# Altium PCB B45100557C.PCBDOC
Units mil, origin at the board's own origin, x right, y up, seen from the top; angles counter-clockwise.
Board outline 6000 x 4000 mil, 4 copper layers (Top Layer, L2, L3, Bottom Layer); 9 components, 46 nets, 208 pads, 0 vias.
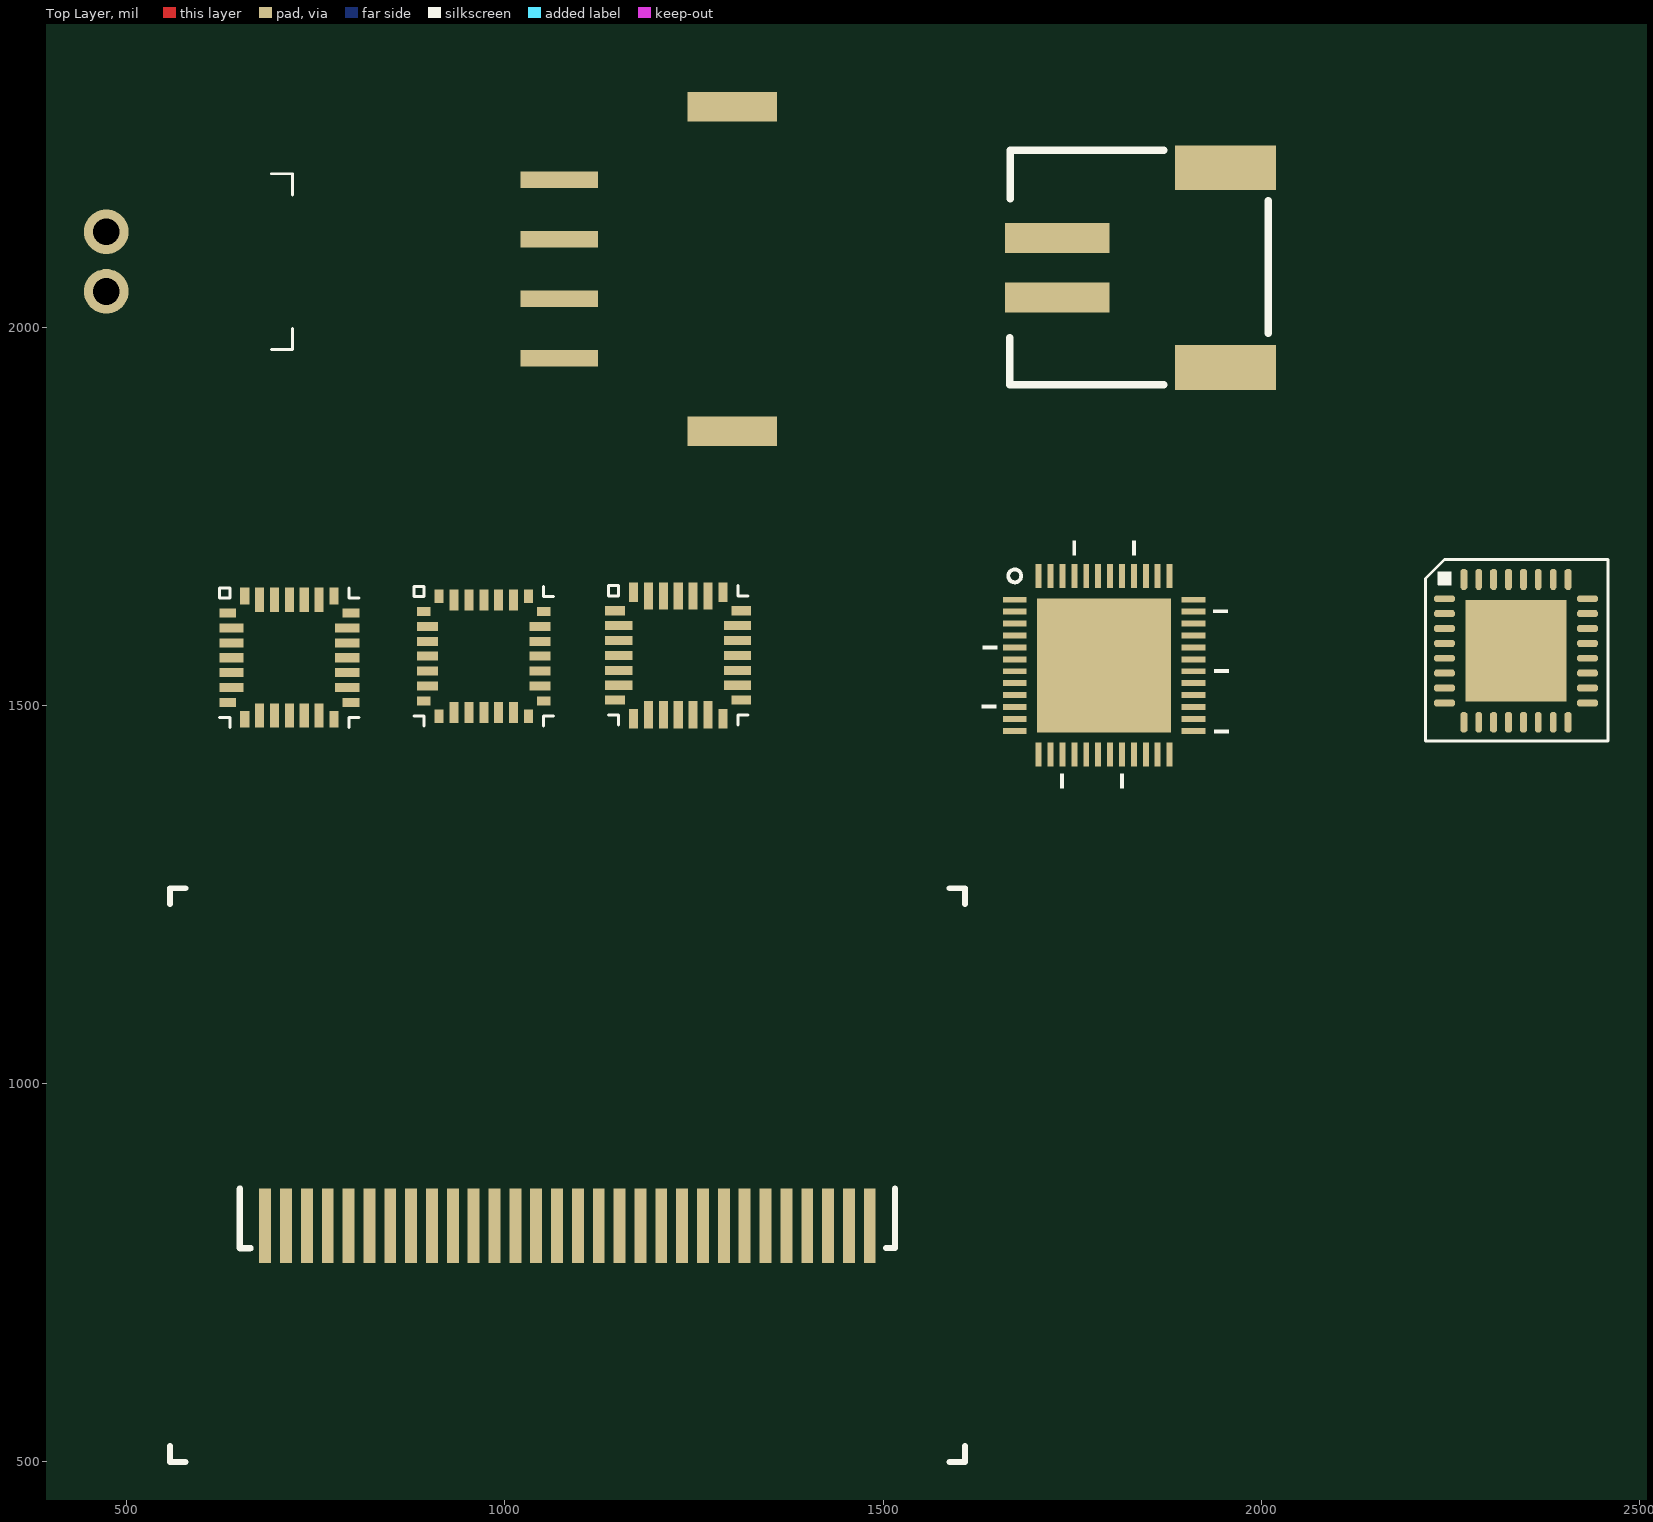
[diagram p0: Top Layer view]
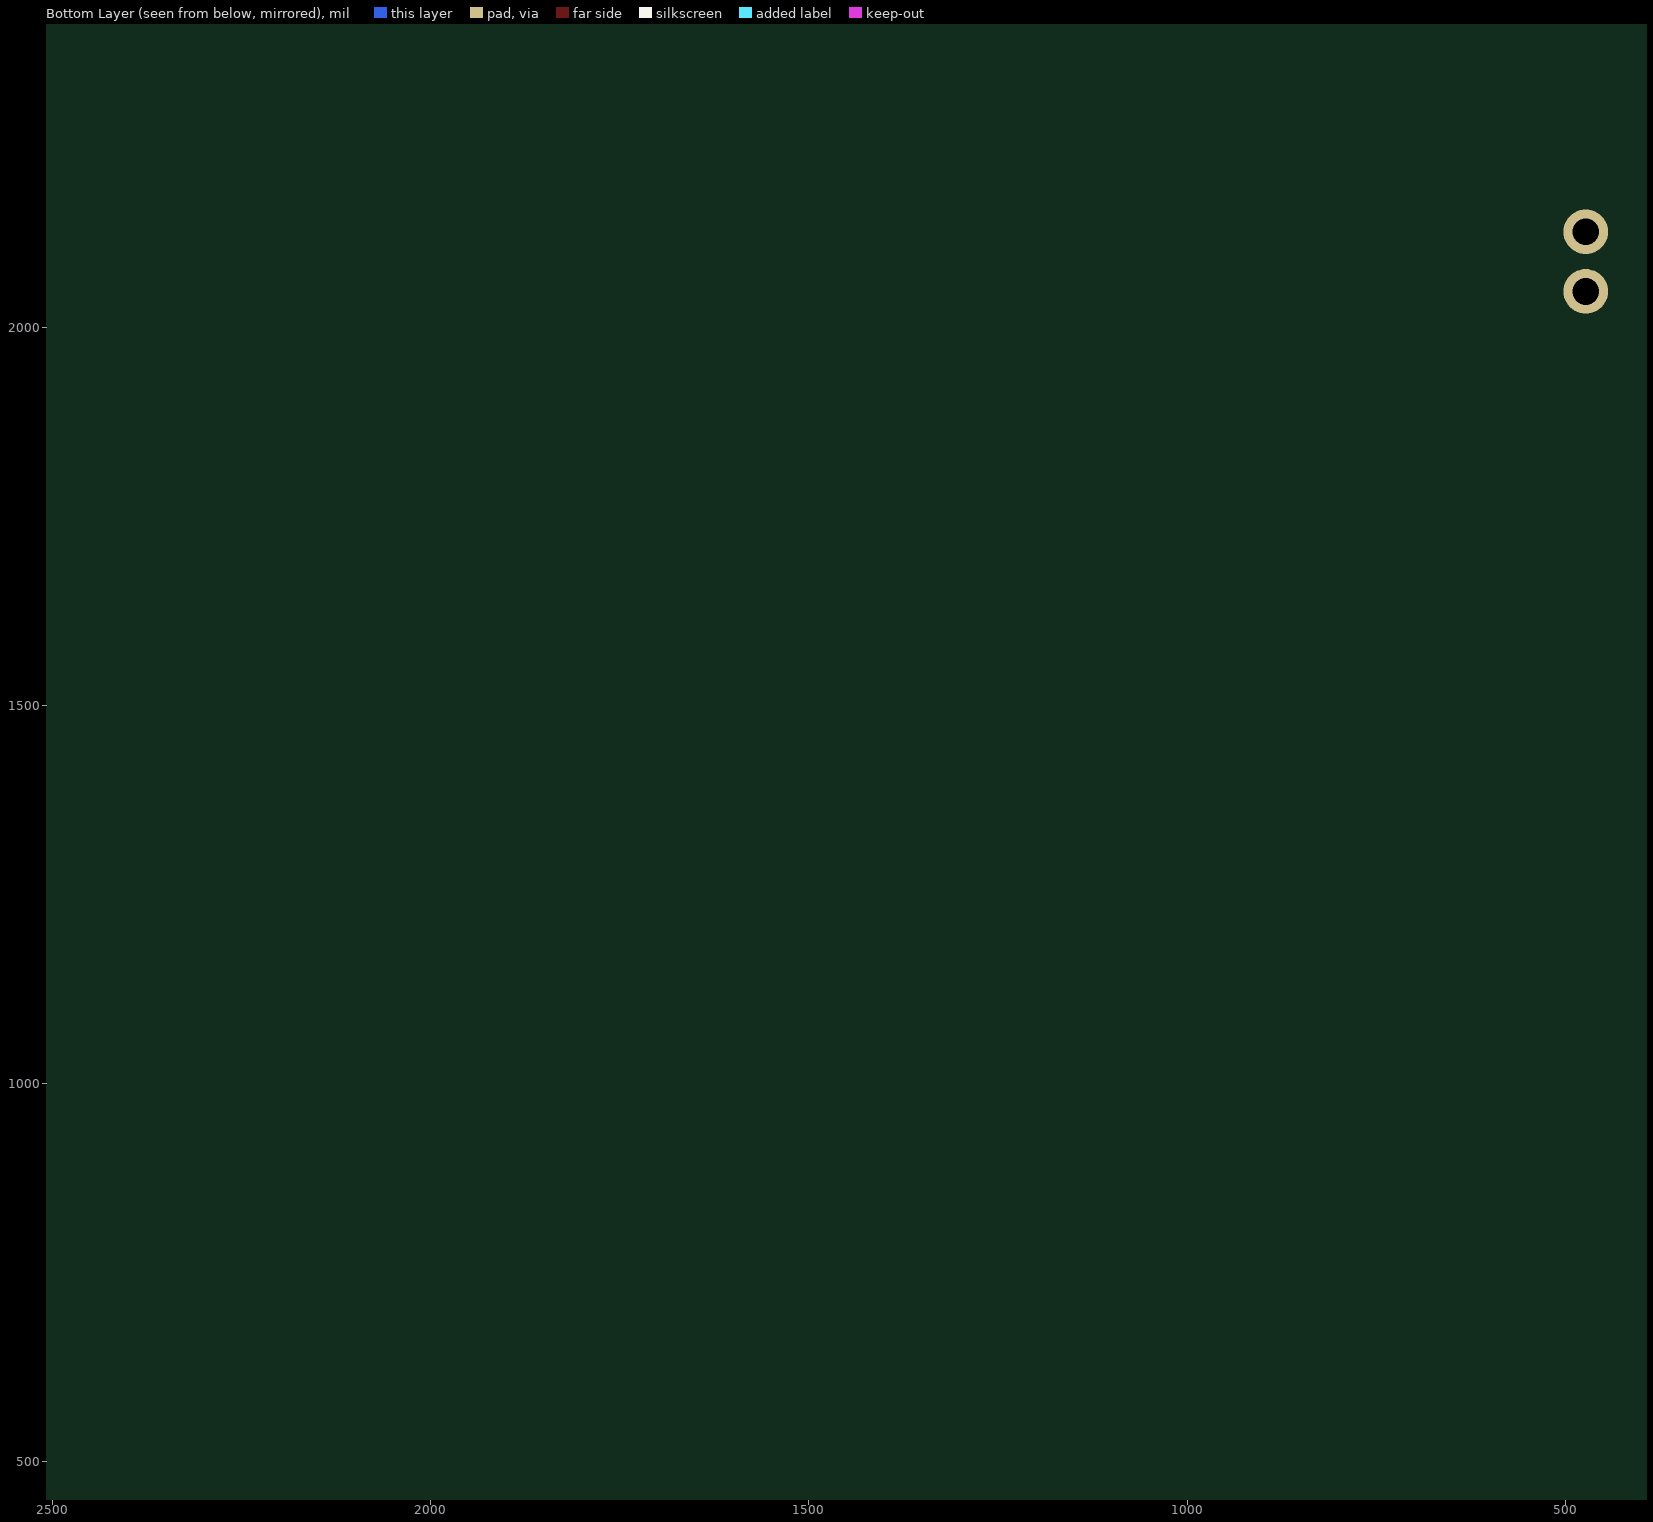
[diagram p1: Bottom Layer view, seen from below]

## Layer stack, top to bottom
Top Layer: signal copper 1.4
Dielectric: core 12.6, FR-4, Dk 4.8
L2: signal copper 1.417
Dielectric: prepreg 12.6, FR-4, Dk 4.8
L3: signal copper 1.417
Dielectric: core 12.6, FR-4, Dk 4.8
Bottom Layer: signal copper 1.4

## Board outline
-599.3,-613.99 5400.7,-613.99 5400.7,3386.01 -599.3,3386.01

## Design rules (kind name [scope] priority, off if disabled: settings)
Clearance [All] p1: gap=6
ComponentClearance [All] p1: gap=0 collisioncheckmode=3 verticalgap=0 showdistances=FALSE
FabricationTestPointUsage TestPointUsage [All] p1: valid=0 allowmultiple=FALSE
FabricationTestpoint Testpoint [All] p1: side=3 testpointundercomponent=TRUE minsize=40 maxsize=100 preferedsize=60 minholesize=0 maxholesize=40 preferedholesize=32 testpointgrid=1 allowsidetop=TRUE allowsidebottom=TRUE usegrid=TRUE gridtolerance=0.01
PolygonConnect PolygonConnect_1 [(InPadClass('All Pads'))] p1: connectstyle=Relief reliefconductorwidth=10 reliefentries=4 polygonreliefangle="90 Angle"
PolygonConnect [All] p2: connectstyle=Direct reliefconductorwidth=10 reliefentries=4 polygonreliefangle="90 Angle"
RoutingVias [All] p1: holewidth=28 width=50 viastyle="Through Hole" minholewidth=28 minwidth=50 maxholewidth=28 maxwidth=50
SilkscreenOverComponentPads [All] p1: minsilkscreentomaskgap=10
SolderMaskExpansion [All] p1: expansion=4
Width [All] p1: maxlimit=100 minlimit=5.91 preferedwidth=6 toplayer_prefwidth=5.98 bottomlayer_prefwidth=5.98 minimp=50.000000 maximp=50.000000 favimp=50.000000
24 further rules are at their usual default settings.

## Components (designator, comment, footprint, x,y, rotation, side; value= is the part's Value field where it differs from the comment)
? "Comment" OLED-0.96-30 557,500 r0 top
? "Comment" UFQFPN32 2242,1641 r0 top
? "Comment" QFN-48-6x6-0.4 1792,1553 r0 top
? "Comment" UFQFPN28-4x4mm-M 1229,1566 r0 top
? "Comment" UFQFPN28-4x4mm-L 972,1565 r0 top
? "Comment" UFQFPN28-4x4mm 715,1563 r0 top
? "Comment" S2B-PH-SM4 1668,2234 r0 top
? "Comment" S4B-PH-SM4 1072,2195 r0 top
? "Comment" S2B-PH-K-S 473,2126 r0 top

## Footprints (in the part's own frame and the unit in brackets; to place one, negate y for a bottom-side part, rotate by r counter-clockwise, add the part's x,y. Pads: shape width x height; smd on the part's side, far side on the other; paste and mask are expansions set on the pad)
OLED-0.96-30 [mm]
  rect 0.4x2.5 smd: 1(3.2,7.925) 2(3.9,7.925) 3(4.6,7.925) 4(5.3,7.925) 5(6,7.925) 6(6.7,7.925) 7(7.4,7.925) 8(8.1,7.925) 9(8.8,7.925) 10(9.5,7.925) 11(10.2,7.925) 12(10.9,7.925) 13(11.6,7.925) 14(12.3,7.925) 15(13,7.925) 16(13.7,7.925) 17(14.4,7.925) 18(15.1,7.925) 19(15.8,7.925) 20(16.5,7.925) 21(17.2,7.925) 22(17.9,7.925) 23(18.6,7.925) 24(19.3,7.925) 25(20,7.925) 26(20.7,7.925) 27(21.4,7.925) 28(22.1,7.925) 29(22.8,7.925) 30(23.5,7.925)
  silkscreen extent 0,0 26.7,19.26
QFN-48-6x6-0.4 [mm]
  rect 4.5x4.5 smd: 0(0,0)
  rect 0.8x0.2 smd: 1(-3,2.2) 2(-3,1.8) 3(-3,1.4) 4(-3,1) 5(-3,0.6) 6(-3,0.2) 7(-3,-0.2) 8(-3,-0.6) 9(-3,-1) 10(-3,-1.4) 11(-3,-1.8) 12(-3,-2.2) 25(3,-2.2) 26(3,-1.8) 27(3,-1.4) 28(3,-1) 29(3,-0.6) 30(3,-0.2) 31(3,0.2) 32(3,0.6) 33(3,1) 34(3,1.4) 35(3,1.8) 36(3,2.2)
  rect 0.2x0.8 smd: 13(-2.2,-3) 14(-1.8,-3) 15(-1.4,-3) 16(-1,-3) 17(-0.6,-3) 18(-0.2,-3) 19(0.2,-3) 20(0.6,-3) 21(1,-3) 22(1.4,-3) 23(1.8,-3) 24(2.2,-3) 37(2.2,3) 38(1.8,3) 39(1.4,3) 40(1,3) 41(0.6,3) 42(0.2,3) 43(-0.2,3) 44(-0.6,3) 45(-1,3) 46(-1.4,3) 47(-1.8,3) 48(-2.2,3)
  silkscreen extent -4.11,-4.14 4.19,4.19
S2B-PH-K-S [mm] "JST"
  round 1.5 hole 0.9: 1(0,0) 2(0,-2)
  silkscreen extent 5.54,-3.95 6.25,1.95
S2B-PH-SM4 [mm] "JST"
  rect 3.5x1 smd: 1(1.575,-2.946) 2(1.575,-4.946)
  rect 3.4x1.5 smd: P1(7.225,-0.596) P2(7.225,-7.296)
  silkscreen extent -0.03,-7.87 8.66,0, body extent 0.02,-7.87 8.62,0.03, height 0.1
S4B-PH-SM4 [mm]
  rect 2.6x0.55 smd: 1(0,0) 2(0,-2) 3(0,-4) 4(0,-6)
  rect 3x1 smd: P1(5.8,2.45) P2(5.8,-8.45)
UFQFPN28-4x4mm [mil]
  rect 22x12 smd paste-6: 1(-81.5,59.06) 7(-81.5,-59.06) 15(81.5,-59.06) 21(81.5,59.06)
  rect 32x12 smd: 2(-76.5,39.37) 3(-76.5,19.68) 4(-76.5,0) 5(-76.5,-19.68) 6(-76.5,-39.37) 16(76.5,-39.37) 17(76.5,-19.68) 18(76.5,0) 19(76.5,19.68) 20(76.5,39.37)
  rect 12x22 smd paste-6: 8(-59.06,-81.5) 14(59.06,-81.5) 22(59.06,81.5) 28(-59.06,81.5)
  rect 12x32 smd: 9(-39.37,-76.5) 10(-19.69,-76.5) 11(0,-76.5) 12(19.68,-76.5) 13(39.37,-76.5) 23(39.37,76.5) 24(19.68,76.5) 25(0,76.5) 26(-19.69,76.5) 27(-39.37,76.5)
  silkscreen extent -92,-92 92,92
UFQFPN28-4x4mm-L [mil]
  rect 18x12 smd: 1(-79.5,59.06) 7(-79.5,-59.06) 15(79.5,-59.06) 21(79.5,59.06)
  rect 28x12 smd: 2(-74.5,39.37) 3(-74.5,19.68) 4(-74.5,0) 5(-74.5,-19.68) 6(-74.5,-39.37) 16(74.5,-39.37) 17(74.5,-19.68) 18(74.5,0) 19(74.5,19.68) 20(74.5,39.37)
  rect 12x18 smd: 8(-59.06,-79.5) 14(59.06,-79.5) 22(59.06,79.5) 28(-59.06,79.5)
  rect 12x28 smd: 9(-39.37,-74.5) 10(-19.69,-74.5) 11(0,-74.5) 12(19.68,-74.5) 13(39.37,-74.5) 23(39.37,74.5) 24(19.68,74.5) 25(0,74.5) 26(-19.69,74.5) 27(-39.37,74.5)
  silkscreen extent -92,-92 92,92
UFQFPN28-4x4mm-M [mil]
  rect 26x12 smd: 1(-83.5,59.06) 7(-83.5,-59.06) 15(83.5,-59.06) 21(83.5,59.06)
  rect 36x12 smd: 2(-78.5,39.37) 3(-78.5,19.68) 4(-78.5,0) 5(-78.5,-19.68) 6(-78.5,-39.37) 16(78.5,-39.37) 17(78.5,-19.68) 18(78.5,0) 19(78.5,19.68) 20(78.5,39.37)
  rect 12x26 smd: 8(-59.06,-83.5) 14(59.06,-83.5) 22(59.06,83.5) 28(-59.06,83.5)
  rect 12x36 smd: 9(-39.37,-78.5) 10(-19.69,-78.5) 11(0,-78.5) 12(19.68,-78.5) 13(39.37,-78.5) 23(39.37,78.5) 24(19.68,78.5) 25(0,78.5) 26(-19.69,78.5) 27(-39.37,78.5)
  silkscreen extent -92,-92 92,92
UFQFPN32 [mm]
  oct 0.7x0.23 smd: 1(0,0) 2(0,-0.5) 3(0,-1) 4(0,-1.5) 5(0,-2) 6(0,-2.5) 7(0,-3) 8(0,-3.5) 17(4.8,-3.5) 18(4.8,-3) 19(4.8,-2.5) 20(4.8,-2) 21(4.8,-1.5) 22(4.8,-1) 23(4.8,-0.5) 24(4.8,0)
  oct 0.23x0.7 smd: 9(0.65,-4.15) 10(1.15,-4.15) 11(1.65,-4.15) 12(2.15,-4.15) 13(2.65,-4.15) 14(3.15,-4.15) 15(3.65,-4.15) 16(4.15,-4.15) 25(4.15,0.65) 26(3.65,0.65) 27(3.15,0.65) 28(2.65,0.65) 29(2.15,0.65) 30(1.65,0.65) 31(1.15,0.65) 32(0.65,0.65)
  rect 3.4x3.4 smd: 33(2.4,-1.75)
  silkscreen extent -0.64,-4.77 5.49,1.32

## Nets (pads, with @x,y where several pads share a name; then routed paths per layer and width w, separated by ;. In a path a pad name is that pad's centre, name@x,y a point inside that pad or via, vN(x,y) a via of type N, cw(c..) or ccw(c..) an arc to the next point about the centre after c; other vN are vias at no path point)
1V8: 
3V: 
BLUE: 
CHG: 
GND: 
I2C_SCL: 
I2C_SDA: 
"IMU INT": 
INSERT: 
NetANT1_1: 
NetC3_1: 
NetC7_2: 
NetC8_2: 
NetC9_1: 
NetC20_1: 
NetC29_1: 
NetC31_1: 
NetC32_1: 
NetINT_1: 
NetL1_1: 
NetL2_2: 
NetL4_1: 
NetLED1_1: 
NetLED1_2: 
NetQ1_1: 
NetR10_1: 
NetR11_1: 
NetR13_2: 
NetR17_2: 
NetR33_2: 
NetRXD_1: 
NetTXD_1: 
RED: 
S1: 
S2: 
SCL: 
SDA: 
SWDCLK: 
SWDIO: 
VBAT: 
VBUS: 
VOLTAGE: 
XC1: 
XC2: 
XL1: 
XL2: 
pads on no net: ?.0 ?.1 ?.2 ?.3 ?.4 ?.5 ?.6 ?.7 ?.8 ?.9 ?.10 ?.11 ?.12 ?.13 ?.14 ?.15 ?.16 ?.17 ?.18 ?.19 ?.20 ?.21 ?.22 ?.23 ?.24 ?.25 ?.26 ?.27 ?.28 ?.29 ?.30 ?.31 ?.32 ?.33 ?.34 ?.35 ?.36 ?.37 ?.38 ?.39 ?.40 ?.41 ?.42 ?.43 ?.44 ?.45 ?.46 ?.47 ?.48 ?.P1 ?.P2